# Altium PCB PCB1.PcbDoc
Units mm, origin at the board's own origin, x right, y up, seen from the top; angles counter-clockwise.
Board outline 40 x 38 mm, 4 copper layers (Top Layer, Layer 1, Layer 2, Bottom Layer), stack 1.564 mm thick; 16 components, 17 nets, 195 pads, 94 vias.
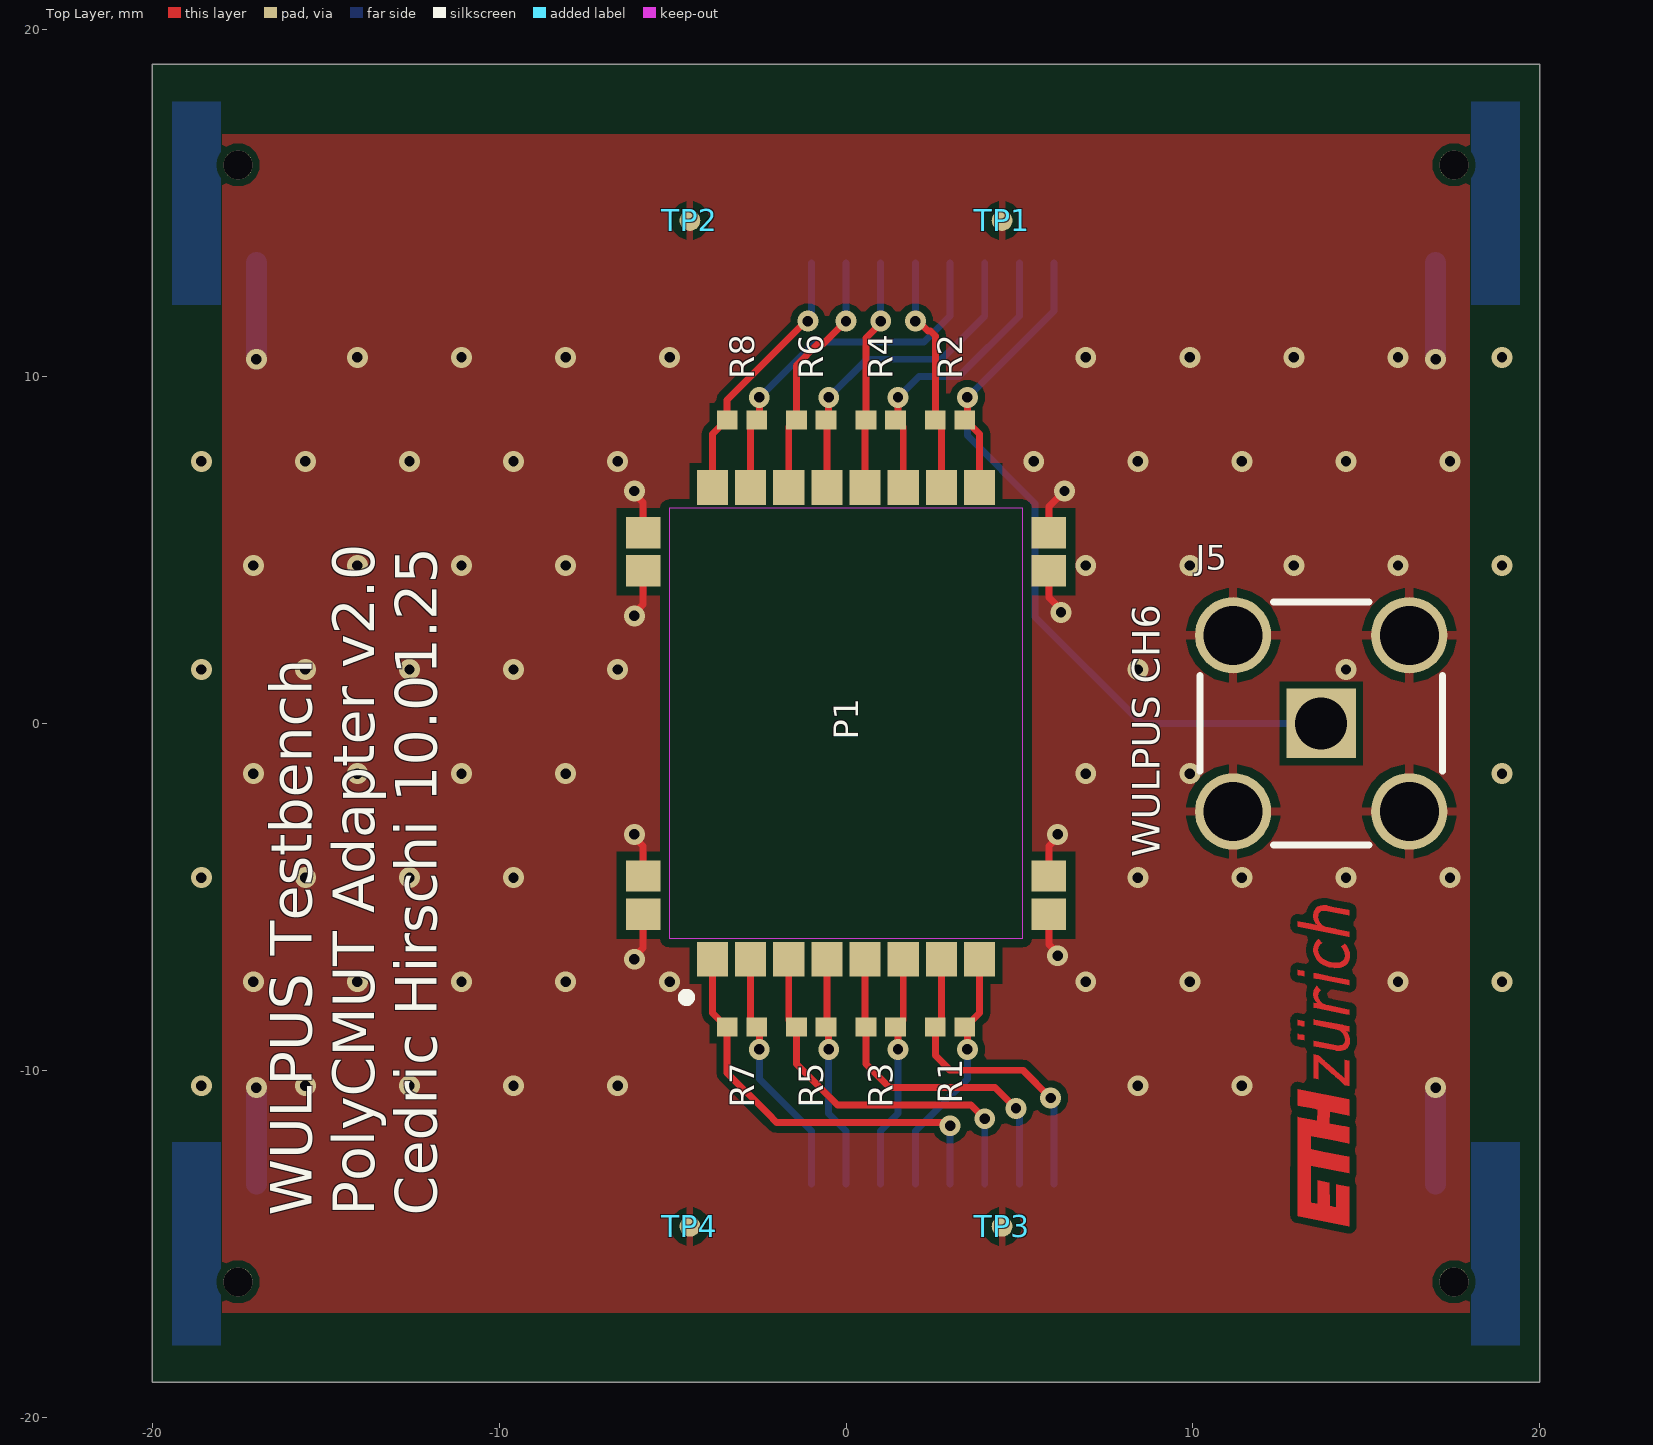
[diagram p0: Top Layer view]
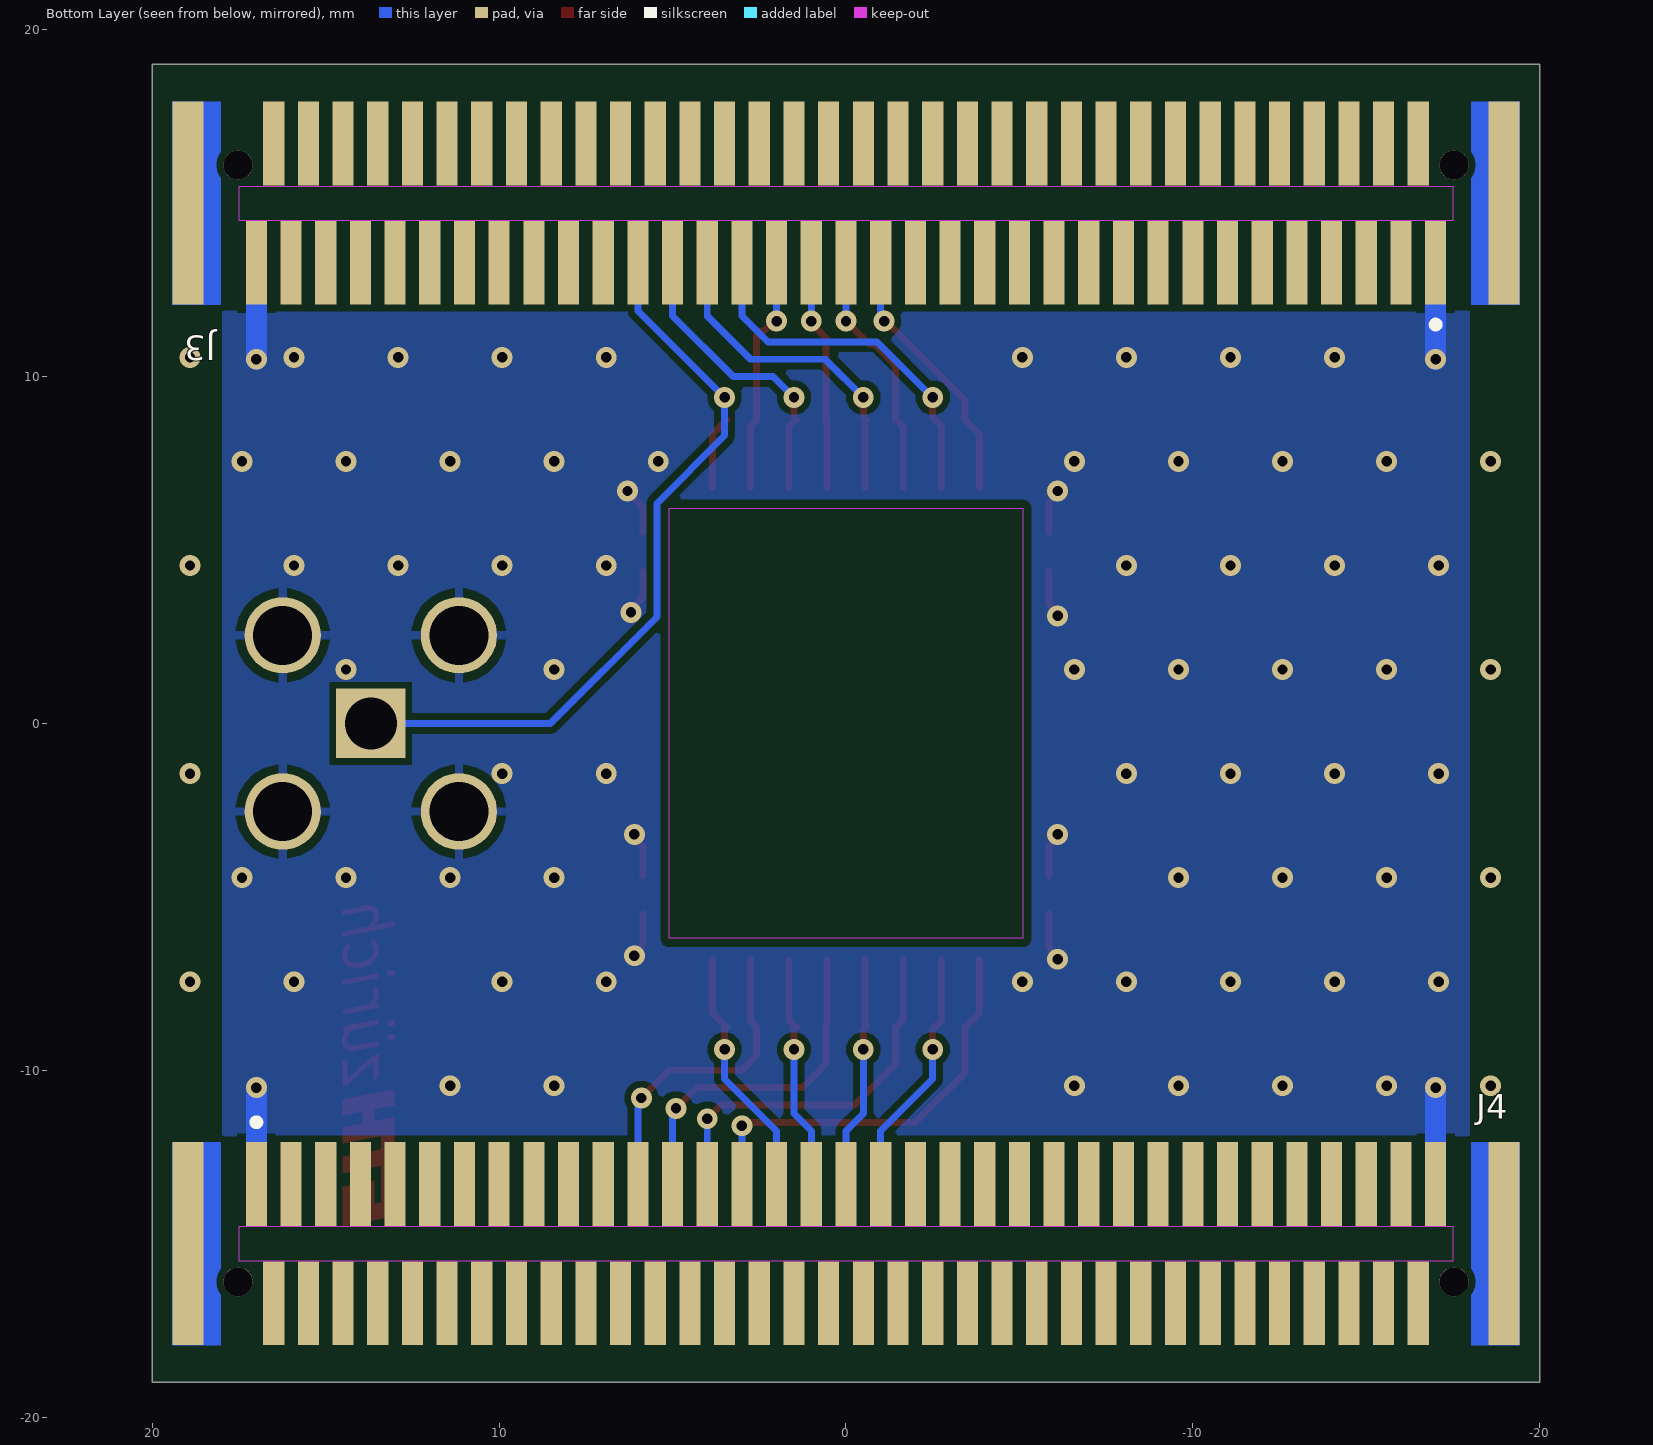
[diagram p1: Bottom Layer view, seen from below]
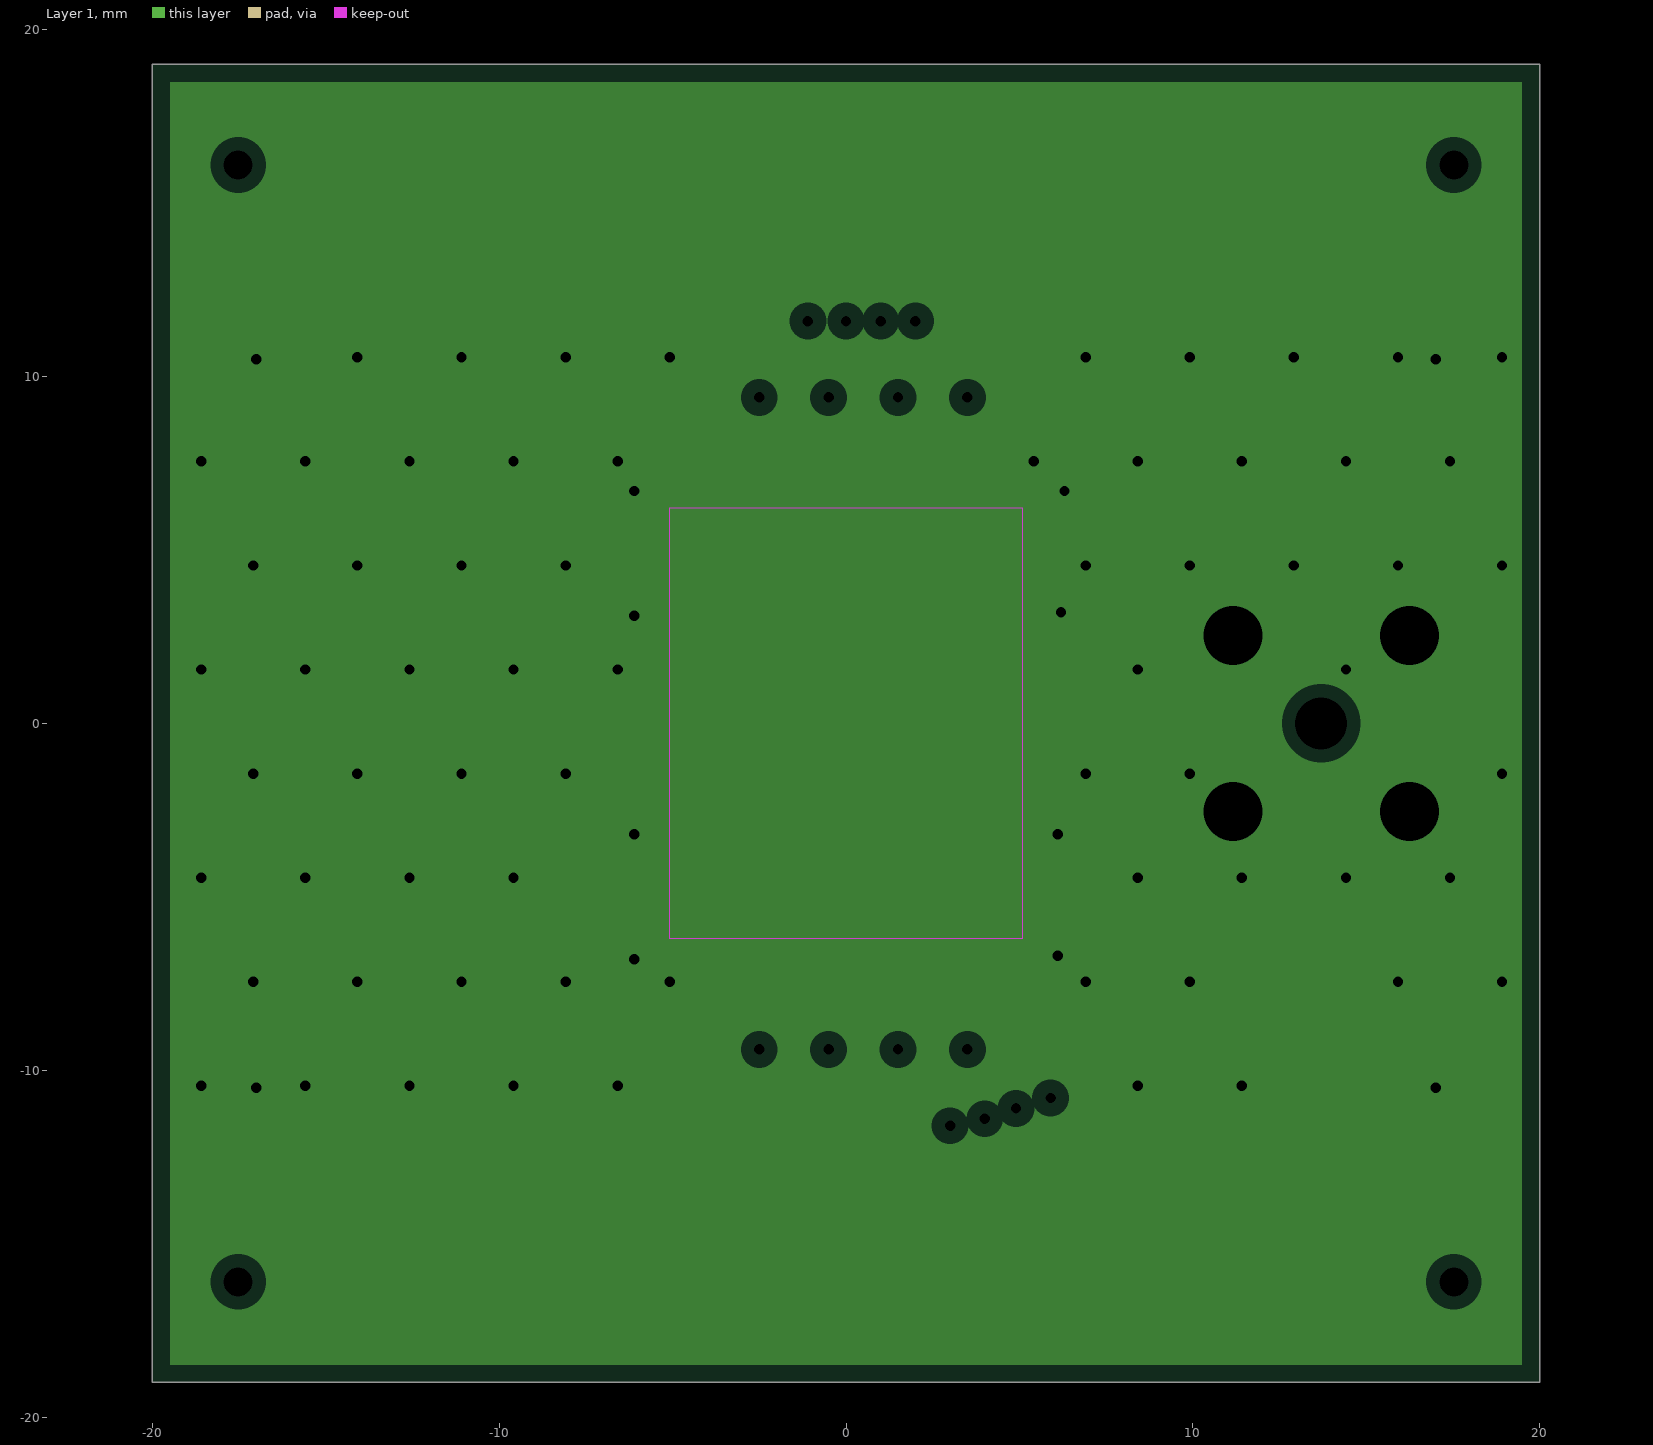
[diagram p2: Layer 1, clearances drawn from the general rule]
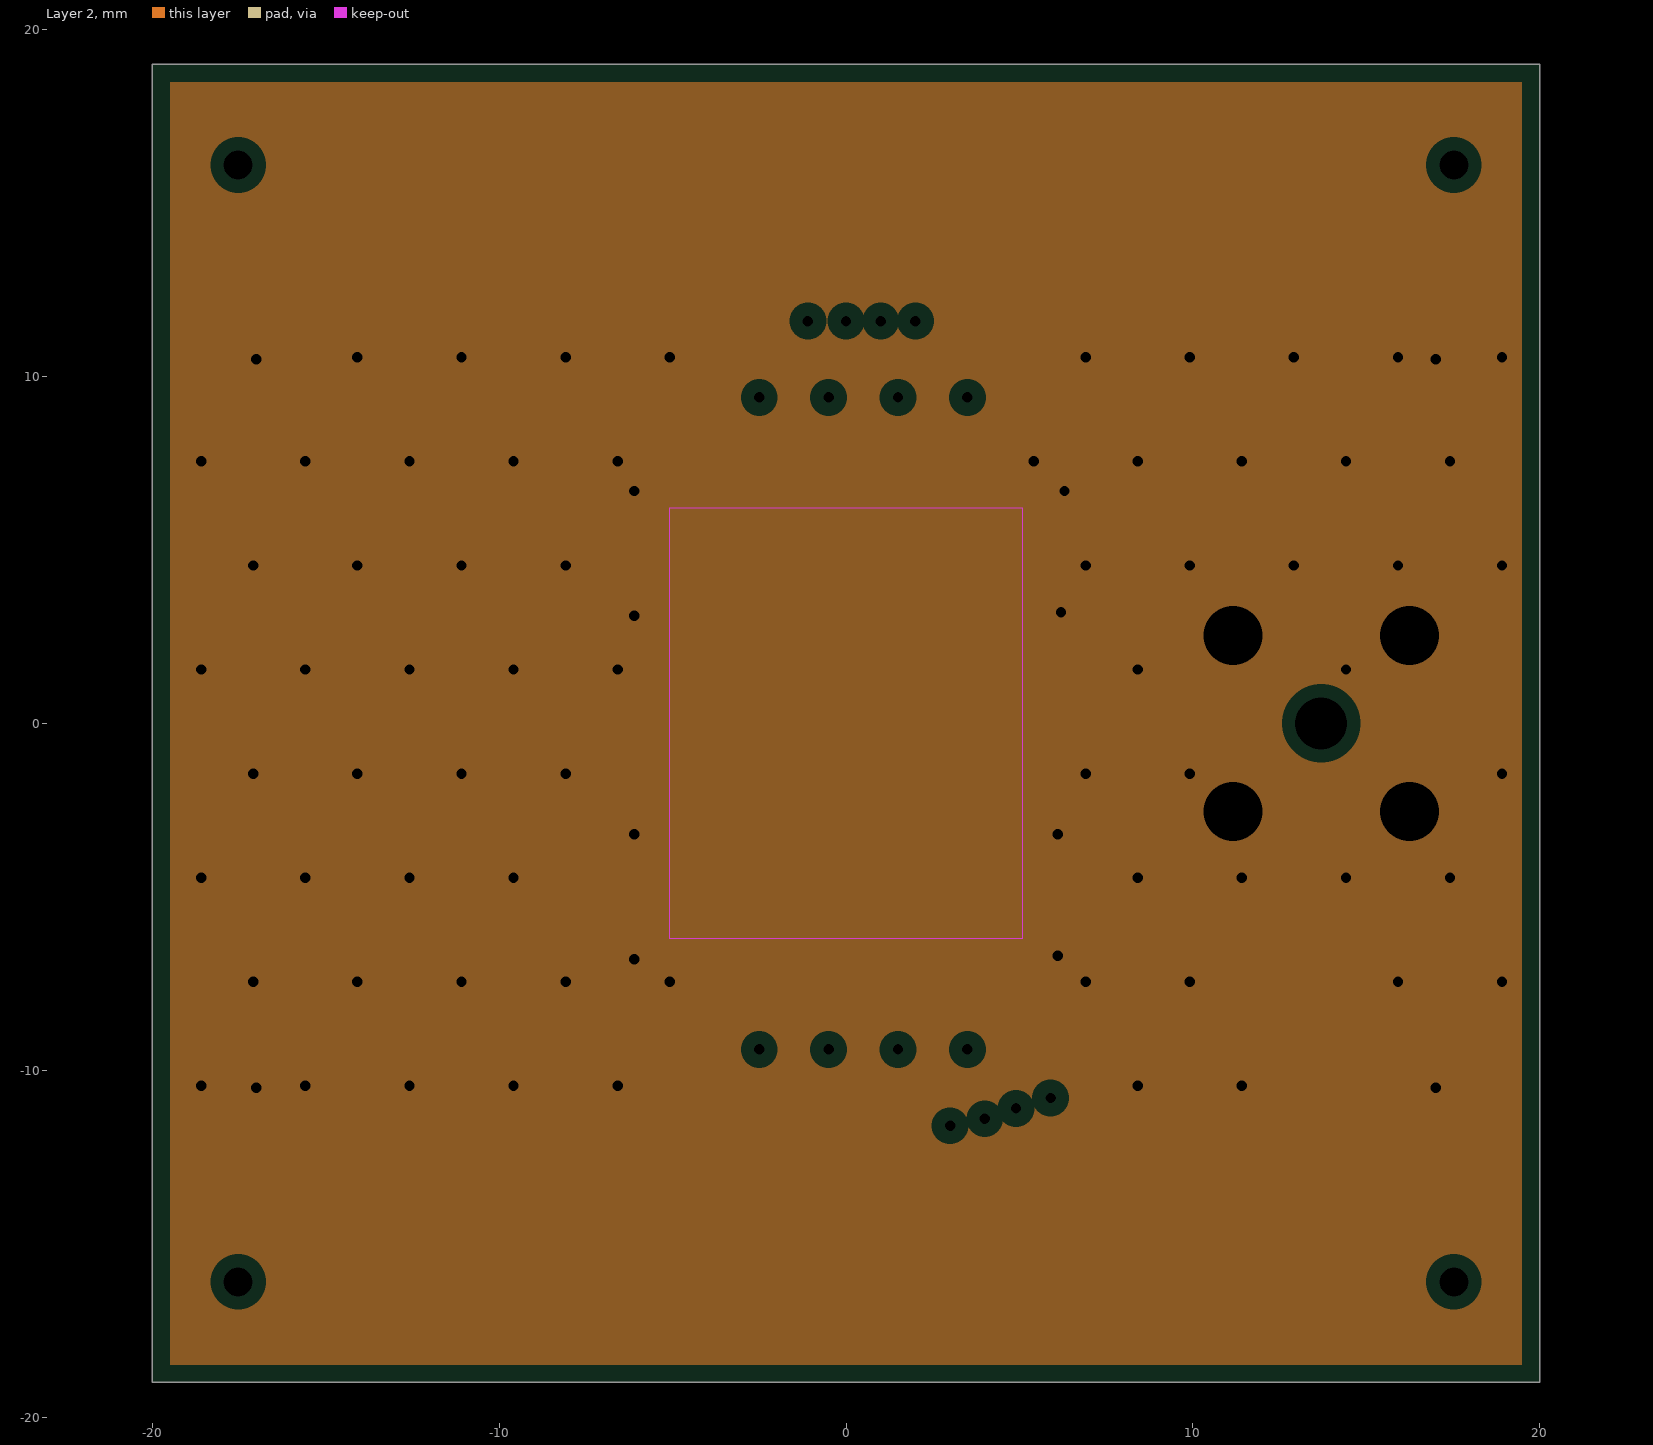
[diagram p3: Layer 2, clearances drawn from the general rule]

## Layer stack, top to bottom
Top Solder: solder mask 0.0127, Solder Resist, Dk 3.3
Top Layer: signal copper 0.035
Dielectric 1: prepreg 0.0994, PP-015, Dk 4.3
Layer 1: plane copper 0.0152, net GND
Dielectric1: core 1.265, FR-4, Dk 4.3
Layer 2: plane copper 0.0152, net GND
Dielectric 2: prepreg 0.0994, PP-015, Dk 4.3
Bottom Layer: signal copper 0.035
Bottom Solder: solder mask 0.0127, Solder Resist, Dk 3.3

## Board outline
-20,-19 -20,19 20,19 20,-19

## Design rules (kind name [scope] priority, off if disabled: settings)
BoardOutlineClearance BoardOutlineClearance_1 [All] p1: gap=0.3 ignorepadtopadclearanceinfootprint=FALSE except(2: Poly-OutlineEdge)
Clearance Clearance_1 [OnMid vs OnMid] p1: gap=0.2 ignorepadtopadclearanceinfootprint=FALSE sourcerule=43 cellrowname=All cellrowtype=0 cellcolname=All cellcoltype=0 innerlayers=TRUE
Clearance Clearance_2 [(ExistsOnLayer('Top Layer') Or ExistsOnLayer('Bottom Layer')) vs (ExistsOnLayer('Top Layer') Or ExistsOnLayer('Bottom Layer'))] p2: gap=0.2 ignorepadtopadclearanceinfootprint=FALSE sourcerule=43 cellrowname=All cellrowtype=0 cellcolname=All cellcoltype=0 outerlayers=TRUE
Clearance [All] p3: gap=0.254 ignorepadtopadclearanceinfootprint=FALSE ismatrix=TRUE
HoleSize [All] p1: absolutevalues=TRUE maxlimit=7.62 minlimit=0.15 maxpercent=80.000 minpercent=20.000
MinimumAnnularRing [All] p1: minimumring=0.13
MinimumSolderMaskSliver [All] p1: minsoldermaskwidth=0.1
PasteMaskExpansion [All] p1: expansion=0.254
PlaneClearance [All] p1: clearance=0.381
PlaneConnect [All] p1: planeconnectstyle=Direct reliefexpansion=0.508 reliefentries=2 reliefconductorwidth=0.254 reliefairgap=0.254
PolygonConnect [All] p1: thpad.connectstyle=Relief thpad.reliefconductorwidth=0.254 thpad.reliefentries=4 thpad.polygonreliefangle="90 Angle" thpad.airgapwidth=0.254 smdpad.connectstyle=Relief smdpad.reliefconductorwidth=0.2 smdpad.reliefentries=2 smdpad.polygonreliefangle="90 Angle" smdpad.airgapwidth=0.254 via.connectstyle=Direct via.reliefconductorwidth=0.254 via.reliefentries=4 via.polygonreliefangle="90 Angle" via.airgapwidth=0.254
RoomDefinition Sheet1 [InComponentClass('Sheet1')] p1: confinementstyle=ConfineIn formatcopy=TRUE lockcomponents=FALSE outline -26.4,-25.4 25.2,-25.4 25.2,25.5 -26.4,25.5
RoutingVias RoutingViaStyle_1 [All] p1: holewidth=0.2 width=0.4 viastyle="Through Hole" minholewidth=0.2 minwidth=0.4 maxholewidth=0.6 maxwidth=0.8
RoutingVias [All] p2: holewidth=0.3 width=0.6 viastyle="Through Hole" minholewidth=0.3 minwidth=0.6 maxholewidth=0.3 maxwidth=0.6
SMDNeckDown [All] p1: percent=100.000
SilkToSolderMaskClearance SilkscreenOverComponentPads [IsPad] p1: minsilkscreentomaskgap=0.254 clearancetoexposedcopper=TRUE
SolderMaskExpansion SolderMaskExpansion_via [IsVia] p1: expansion=0.102 istentingtop=TRUE useseparateexpansions=TRUE expansionbottom=0.102 istentingbottom=TRUE
SolderMaskExpansion [All] p2: expansion=0.1 istentingtop=FALSE
Width MaxMinWidth_1 [All] p1: maxlimit=1 minlimit=0.2 preferedwidth=0.2 minimp=50.000000 maximp=50.000000 favimp=50.000000
Width [All] p2: maxlimit=0.254 minlimit=0.2 preferedwidth=0.2 minimp=50.000000 maximp=50.000000 favimp=50.000000
24 further rules are at their usual default settings.

## Components (designator, comment, footprint, x,y, rotation, side; value= is the part's Value field where it differs from the comment)
J3 "91910-21169LF" AMPHENOL_91910-21169LF 0,-15 r180 bottom locked
J4 "91910-21169LF" AMPHENOL_91910-21169LF 0,15 r0 bottom locked
J5 "901-144-8RFX" AMPH-901-144-8RFX_V 13.7,0 r0 top locked
P1 "polycmut" Interposer 0,0 r180 top
R1 "0" RESC1005X40X25NL05T10 3,-8.75 r180 top
R2 "0" RESC1005X40X25NL05T10 3,8.75 r180 top
R3 "0" RESC1005X40X25NL05T10 1,-8.75 r180 top
R4 "0" RESC1005X40X25NL05T10 1,8.75 r180 top
R5 "0" RESC1005X40X25NL05T10 -1,-8.75 r180 top
R6 "0" RESC1005X40X25NL05T10 -1,8.75 r180 top
R7 "0" RESC1005X40X25NL05T10 -3,-8.75 r180 top
R8 "0" RESC1005X40X25NL05T10 -3,8.75 r180 top
TP1 "TPAD6R" TP06R 4.5,14.5 r90 top locked
TP2 "TPAD6R" TP06R -4.5,14.5 r90 top locked
TP3 "TPAD6R" TP06R 4.5,-14.5 r90 top locked
TP4 "TPAD6R" TP06R -4.5,-14.5 r90 top locked

## Footprints (in the part's own frame and the unit in brackets; to place one, negate y for a bottom-side part, rotate by r counter-clockwise, add the part's x,y. Pads: shape width x height; smd on the part's side, far side on the other; paste and mask are expansions set on the pad)
AMPH-901-144-8RFX_V [mm] "THD, 5-Leads, Body 7x7mm, Pitch 2.54mm"
  rect 2x2 hole 1.5: 1(0,0)
  round 2.2 hole 1.7: 2(-2.54,2.54) 3(-2.54,-2.54) 4(2.54,-2.54) 5(2.54,2.54)
  silkscreen extent -3.5,-3.5 3.5,3.5, body extent -3.55,-3.55 3.55,3.55, height 9.53
AMPHENOL_91910-21169LF [mm]
  rect 0.61x2.41 smd paste-2: 1(-17,1.72) 2(-16,1.72) 3(-15,1.72) 4(-14,1.72) 5(-13,1.72) 6(-12,1.72) 7(-11,1.72) 8(-10,1.72) 9(-9,1.72) 10(-8,1.72) 11(-7,1.72) 12(-6,1.72) 13(-5,1.72) 14(-4,1.72) 15(-3,1.72) 16(-2,1.72) 17(-1,1.72) 18(0,1.72) 19(1,1.72) 20(2,1.72) 21(3,1.72) 22(4,1.72) 23(5,1.72) 24(6,1.72) 25(7,1.72) 26(8,1.72) 27(9,1.72) 28(10,1.72) 29(11,1.72) 30(12,1.72) 31(13,1.72) 32(14,1.72) 33(15,1.72) 34(16,1.72) 35(17,1.72) 36(-16.5,-1.72) 37(-15.5,-1.72) 38(-14.5,-1.72) 39(-13.5,-1.72) 40(-12.5,-1.72) 41(-11.5,-1.72) 42(-10.5,-1.72) 43(-9.5,-1.72) 44(-8.5,-1.72) 45(-7.5,-1.72) 46(-6.5,-1.72) 47(-5.5,-1.72) 48(-4.5,-1.72) 49(-3.5,-1.72) 50(-2.5,-1.72) 51(-1.5,-1.72) 52(-0.5,-1.72) 53(0.5,-1.72) 54(1.5,-1.72) 55(2.5,-1.72) 56(3.5,-1.72) 57(4.5,-1.72) 58(5.5,-1.72) 59(6.5,-1.72) 60(7.5,-1.72) 61(8.5,-1.72) 62(9.5,-1.72) 63(10.5,-1.72) 64(11.5,-1.72) 65(12.5,-1.72) 66(13.5,-1.72) 67(14.5,-1.72) 68(15.5,-1.72) 69(16.5,-1.72)
  rect 0.89x5.85 smd mask+0: SH1(-18.975,0) SH2(18.975,0)
  round 0.84 hole 0.84 unplated: ""(-17.526,-1.1) ""(17.526,-1.1)
  Top Layer region: -18.02,-0.71 -18.029,-0.722 -18.038,-0.733 -18.046,-0.744 -18.054,-0.756 -18.062,-0.768 -18.069,-0.78 -18.076,-0.792 -18.083,-0.804 -18.089,-0.817 -18.096,-0.829 -18.101,-0.842 -18.107,-0.855 -18.112,-0.868 -18.117,-0.881 -18.122,-0.894 -18.127,-0.907 -18.131,-0.921 -18.135,-0.934 -18.138,-0.948 -18.141,-0.962 -18.144,-0.975 -18.147,-0.989 -18.149,-1.003 -18.151,-1.017 -18.152,-1.031 -18.153,-1.045 -18.154,-1.059 -18.155,-1.073 -18.155,-1.087 -18.155,-1.1 -18.155,-1.113 -18.155,-1.127 -18.154,-1.141 -18.153,-1.155 -18.152,-1.169 -18.151,-1.183 -18.149,-1.197 -18.147,-1.211 -18.144,-1.225 -18.141,-1.238 -18.138,-1.252 -18.135,-1.266 -18.131,-1.279 -18.127,-1.293 -18.122,-1.306 -18.117,-1.319 -18.112,-1.332 -18.107,-1.345 -18.101,-1.358 -18.096,-1.371 -18.089,-1.383 -18.083,-1.396 -18.076,-1.408 -18.069,-1.42 -18.062,-1.432 -18.054,-1.444 -18.046,-1.456 -18.038,-1.467 -18.029,-1.478 -18.02,-1.49 -18.02,-2.925 -19.42,-2.925 -19.42,2.925 -18.02,2.925
  Top Layer region: 19.42,-2.925 18.02,-2.925 18.02,-1.49 18.029,-1.478 18.038,-1.467 18.046,-1.456 18.054,-1.444 18.062,-1.432 18.069,-1.42 18.076,-1.408 18.083,-1.396 18.089,-1.383 18.096,-1.371 18.101,-1.358 18.107,-1.345 18.112,-1.332 18.117,-1.319 18.122,-1.306 18.127,-1.293 18.131,-1.279 18.135,-1.266 18.138,-1.252 18.141,-1.238 18.144,-1.225 18.147,-1.211 18.149,-1.197 18.151,-1.183 18.152,-1.169 18.153,-1.155 18.154,-1.141 18.155,-1.127 18.155,-1.113 18.155,-1.11 18.155,-1.1 18.155,-1.087 18.155,-1.073 18.154,-1.059 18.153,-1.045 18.152,-1.031 18.151,-1.017 18.149,-1.003 18.147,-0.989 18.144,-0.975 18.141,-0.962 18.138,-0.948 18.135,-0.934 18.131,-0.921 18.127,-0.907 18.122,-0.894 18.117,-0.881 18.112,-0.868 18.107,-0.855 18.101,-0.842 18.096,-0.829 18.089,-0.817 18.083,-0.804 18.076,-0.792 18.069,-0.78 18.062,-0.768 18.054,-0.756 18.046,-0.744 18.038,-0.733 18.029,-0.722 18.02,-0.71 18.02,2.925 19.42,2.925
  silkscreen extent -17.1,3.4 -16.9,3.6, body extent -19.65,-2.8 19.65,2.8, height 3.61
Interposer [mm]
  rect 1x0.9 smd: 1(5.85,4.4) 1(5.85,5.5) 10(-5.85,4.4) 10(-5.85,5.5) 11(5.85,-5.5) 11(5.85,-4.4) 20(-5.85,-5.5) 20(-5.85,-4.4)
  rect 0.9x1 smd: 2(3.85,6.8) 3(2.75,6.8) 4(1.65,6.8) 5(0.55,6.8) 6(-0.55,6.8) 7(-1.65,6.8) 8(-2.75,6.8) 9(-3.85,6.8) 12(3.85,-6.8) 13(2.75,-6.8) 14(1.65,-6.8) 15(0.55,-6.8) 16(-0.55,-6.8) 17(-1.65,-6.8) 18(-2.75,-6.8) 19(-3.85,-6.8)
  silkscreen extent 4.47,7.78 4.72,8.02, body extent -5.75,-6.7 5.75,6.7, height 1.6
RESC1005X40X25NL05T10 [mm] "Chip Resistor, 2-Leads, Body 1.00x0.50mm, IPC Medium Density"
  rect 0.6x0.55 smd: 1(-0.425,0) 2(0.425,0)
  body extent -0.53,-0.27 0.53,0.28, height 0.4
TP06R [mm] "Testpoint, round, d=0.6mm"
  round 0.6 smd paste-1: 1(0,0)

## Part data
J3 J4: Package=None, Availability=Unavailable, MF="Amphenol ICC (FCI)", MP=91910-21169LF, Price=None
J5: library part CMP-2000-05706-1, "Coaxial Connector, 18 GHz, 50 Ohm, -65 to 165 degC, 5-Pin THD, RoHS, Bulk", Dielectric Material=Polytetrafluoroethylene(PTFE), Frequency - Max=18GHz, Housing Color=Gold, Manufacturer=Amphenol, Operating Temperature=-65°C~165°C, Package Description="5-Pin Through Hole Device, Body 7 x 7 mm, Pitch 2.54 mm", Standard Package=1, Voltage Rating=-, 3D Model=901-144-8RFX.igs, Body Finish=Gold, Body Material=Brass, Cable Group=-, Category=Connectors,Interconnects, Center Contact Material=BerylliumCopper, Center Contact Plating=Gold, Connector Style=SMA, Connector Type=Jack,FemaleSocket, Contact Termination=Solder, Datasheet URL=https://datasheet.ciiva.com/23676/c901-144-8rfx-23676337.pdf, Datasheet Version="Rev. A, 01/2001", Family=CoaxialConnectors(RF), Fastening Type=Threaded, Features=-, Impedance=50Ohm, Ingress Protection=-, Manufacturer URL=http://www.amphenol.com/, Mounting Technology=SurfaceMount, Mounting Type=ThroughHole, Online Catalog=SMA,RFX, Other Names=901-144-8-RFX9011448RFXARFX1231, Package Reference=901-144-8RFX, Packaging=Bulk, Series=-, Shield Termination=Solder
R1 R2 R3 R4 R5 R6 R7 R8: library part CMP-1011-00001-2, Manufacturer="Yageo / Phycomp", Part Number=RC0402JR-070RL
TP1 TP2 TP3 TP4: library part CMP-00028-00002-2, "0.6mm round", Pins=1

## Via types
v1: diameter 0.6, hole 0.3, Top Layer to Bottom Layer, tented both sides, 66 vias
v2: diameter 0.6/0.6 (per signal layer), hole 0.3, Top Layer to Bottom Layer, tented both sides, 28 vias

## Nets (pads, with @x,y where several pads share a name; then routed paths per layer and width w, separated by ;. In a path a pad name is that pad's centre, name@x,y a point inside that pad or via, vN(x,y) a via of type N, cw(c..) or ccw(c..) an arc to the next point about the centre after c; other vN are vias at no path point)
CH1: J3.15 P1.2 R7.2 | length 12.2
  Top Layer w0.2: P1.2 -3.85,-8.35 -3.45,-8.75 R7.2 -3.425,-10.075 -2.25,-11.25 -2,-11.5 2.733,-11.5 2.775,-11.543 2.943,-11.543 v2(3,-11.6)
  Bottom Layer w0.2: J3.15 v2(3,-11.6)
CH2: J3.19 P1.3 R7.1 | length 7.2
  Top Layer w0.2: P1.3 -2.75,-8.575 -2.5,-8.825 v2(-2.5,-9.4)
  Bottom Layer w0.2: v2(-2.5,-9.4) -2.5,-10.25 -1,-11.75 J3.19
CH3: J3.14 P1.4 R5.2 | length 11.1
  Top Layer w0.2: P1.4 -1.65,-8.55 -1.45,-8.75 R5.2 -1.425,-9.825 -0.25,-11 3.6,-11 v2(4,-11.4)
  Bottom Layer w0.2: J3.14 v2(4,-11.4)
CH4: J3.18 P1.5 R5.1 | length 6.7
  Top Layer w0.2: P1.5 -0.55,-8.725 R5.1 -0.5,-8.825 v2(-0.5,-9.4)
  Bottom Layer w0.2: v2(-0.5,-9.4) -0.5,-11.25 0,-11.75 J3.18
CH5: J3.13 P1.6 R3.2 | length 10.1
  Top Layer w0.2: P1.6 0.55,-8.725 R3.2 0.575,-9.825 1.25,-10.5 4.3,-10.5 v2(4.9,-11.1)
  Bottom Layer w0.2: v2(4.9,-11.1) 4.9,-11.181 5,-11.281 J3.13
CH6: J3.17 P1.7 R3.1 | length 6.8
  Top Layer w0.2: v2(1.5,-9.4) 1.5,-8.825 R3.1 1.45,-8.75 1.65,-8.55 P1.7
  Bottom Layer w0.2: J3.17 1,-11.75 1.5,-11.25 v2(1.5,-9.4)
CH7: J3.12 P1.8 R1.2 | length 9.2
  Top Layer w0.2: P1.8 2.75,-8.575 R1.2 2.575,-9.575 3,-10 5.1,-10 v2(5.9,-10.8)
  Bottom Layer w0.2: v2(5.9,-10.8) 5.9,-10.881 6,-10.981 J3.12
CH8: J3.16 P1.9 R1.1 | length 7.3
  Top Layer w0.2: v2(3.5,-9.4) 3.5,-8.825 R1.1 3.45,-8.75 3.85,-8.35 P1.9
  Bottom Layer w0.2: J3.16 2,-11.75 3.5,-10.25 v2(3.5,-9.4)
CH9: J4.24 J5.1 P1.19 R2.1 | length 24.4
  Top Layer w0.2: v2(3.5,9.4) 3.5,8.825 R2.1 3.45,8.75 3.85,8.35 P1.19
  Bottom Layer w0.2: J4.24 5.992,13.272 5.992,11.892 v2(3.5,9.4) 3.5,8.301 5.454,6.347 5.454,3.072 8.526,0 J5.1
CH10: J4.20 P1.18 R2.2 | length 6.9
  Top Layer w0.2: v2(2,11.6) 2.081,11.6 2.365,11.316 2.434,11.316 2.575,11.175 R2.2 2.75,8.575 P1.18
  Bottom Layer w0.2: v2(2,11.6) J4.20
CH11: J4.23 P1.17 R4.1 | length 8.7
  Top Layer w0.2: v2(1.5,9.4) 1.5,8.825 R4.1 1.45,8.75 1.65,8.55 P1.17
  Bottom Layer w0.2: v2(1.5,9.4) 2.1,10 3.25,10 5,11.75 J4.23
CH12: J4.19 P1.16 R4.2 | length 6.7
  Top Layer w0.2: P1.16 0.55,8.725 R4.2 0.575,11.106 1,11.531 v2(1,11.6)
  Bottom Layer w0.2: v2(1,11.6) J4.19
CH13: J4.22 P1.15 R6.1 | length 9.6
  Top Layer w0.2: P1.15 -0.55,8.725 R6.1 -0.5,8.825 v2(-0.5,9.4)
  Bottom Layer w0.2: v2(-0.5,9.4) 0.6,10.5 2.75,10.5 4,11.75 J4.22
CH14: J4.18 P1.14 R6.2 | length 7.3
  Top Layer w0.2: P1.14 -1.65,8.55 -1.45,8.75 R6.2 -1.425,10.325 -0.816,10.934 -0.666,10.934 v2(0,11.6)
  Bottom Layer w0.2: v2(0,11.6) J4.18
CH15: J4.21 P1.13 R8.1 | length 10.7
  Top Layer w0.2: P1.13 -2.75,8.575 -2.5,8.825 v2(-2.5,9.4)
  Bottom Layer w0.2: v2(-2.5,9.4) -0.9,11 2.25,11 3,11.75 J4.21
CH16: J4.17 P1.12 R8.2 | length 7.7
  Top Layer w0.2: P1.12 -3.85,8.35 -3.45,8.75 R8.2 -3.425,9.325 -1.15,11.6 v2(-1.1,11.6)
  Bottom Layer w0.2: v2(-1.1,11.6) -1.1,11.681 -1,11.781 J4.17
GND: J3.1 J3.35 J4.1 J4.35 J5.2 J5.3 J5.4 J5.5 P1.1 P1.10 P1.11 P1.20 TP1.1 TP2.1 TP3.1 TP4.1 | length 21.9
  Top Layer w0.2: v2(-6.1,-6.8) -6.1,-6.719 -5.85,-6.469 P1.1@-5.85,-5.5 ; v2(-6.1,-3.2) -6.1,-3.281 -5.85,-3.531 P1.1@-5.85,-4.4 ; v2(-6.1,3.1) -6.1,3.181 -5.85,3.431 P1.11@-5.85,4.4 ; v2(-6.1,6.7) -6.1,6.619 -5.85,6.369 P1.11@-5.85,5.5 ; P1.10@5.85,-5.5 5.85,-6.369 6.1,-6.619 v2(6.1,-6.7) ; P1.10@5.85,-4.4 5.85,-3.531 6.1,-3.281 v2(6.1,-3.2) ; P1.20@5.85,4.4 5.85,3.628 6.2,3.278 v2(6.2,3.2) ; P1.20@5.85,5.5 5.85,6.25 v2(6.3,6.7)
  Bottom Layer w0.61: J3.35 v2(-17,-10.5) ; v2(-17,10.5) J4.1 ; J3.1 v2(17,-10.5) ; v2(17,10.5) J4.35
  other v1: -18.586,-10.446 -15.586,-10.446 -12.586,-10.446 -9.586,-10.446 -6.586,-10.446 8.414,-10.446 11.414,-10.446 -17.086,-7.446 -14.086,-7.446 -11.086,-7.446 -8.086,-7.446 -5.086,-7.446 6.914,-7.446 9.914,-7.446 15.914,-7.446 18.914,-7.446 -18.586,-4.446 -15.586,-4.446 -12.586,-4.446 -9.586,-4.446 8.414,-4.446 11.414,-4.446 14.414,-4.446 17.414,-4.446 -17.086,-1.446 -14.086,-1.446 -11.086,-1.446 -8.086,-1.446 6.914,-1.446 9.914,-1.446 18.914,-1.446 -18.586,1.554 -15.586,1.554 -12.586,1.554 -9.586,1.554 -6.586,1.554 8.414,1.554 14.414,1.554 -17.086,4.554 -14.086,4.554 -11.086,4.554 -8.086,4.554 6.914,4.554 9.914,4.554 12.914,4.554 15.914,4.554 18.914,4.554 -18.586,7.554 -15.586,7.554 -12.586,7.554 -9.586,7.554 -6.586,7.554 5.414,7.554 8.414,7.554 11.414,7.554 14.414,7.554 17.414,7.554 -14.086,10.554 -11.086,10.554 -8.086,10.554 -5.086,10.554 6.914,10.554 9.914,10.554 12.914,10.554 15.914,10.554 18.914,10.554
pads on no net: J3. J3.2 J3.3 J3.4 J3.5 J3.6 J3.7 J3.8 J3.9 J3.10 J3.11 J3.20 J3.21 J3.22 J3.23 J3.24 J3.25 J3.26 J3.27 J3.28 J3.29 J3.30 J3.31 J3.32 J3.33 J3.34 J3.36 J3.37 J3.38 J3.39 J3.40 J3.41 J3.42 J3.43 J3.44 J3.45 J3.46 J3.47 J3.48 J3.49 J3.50 J3.51 J3.52 J3.53 J3.54 J3.55 J3.56 J3.57 J3.58 J3.59 J3.60 J3.61 J3.62 J3.63 J3.64 J3.65 J3.66 J3.67 J3.68 J3.69 J3.SH1 J3.SH2 J4. J4.2 J4.3 J4.4 J4.5 J4.6 J4.7 J4.8 J4.9 J4.10 J4.11 J4.12 J4.13 J4.14 J4.15 J4.16 J4.25 J4.26 J4.27 J4.28 J4.29 J4.30 J4.31 J4.32 J4.33 J4.34 J4.36 J4.37 J4.38 J4.39 J4.40 J4.41 J4.42 J4.43 J4.44 J4.45 J4.46 J4.47 J4.48 J4.49 J4.50 J4.51 J4.52 J4.53 J4.54 J4.55 J4.56 J4.57 J4.58 J4.59 J4.60 J4.61 J4.62 J4.63 J4.64 J4.65 J4.66 J4.67 J4.68 J4.69 J4.SH1 J4.SH2

## Polygon pours and split planes (outlines as drawn)
GND on Bottom Layer "GND_L04_P000" (solid, remove dead copper, pour order 0): -22.5,22.5 -22.5,-22.5 22.5,-22.5 22.5,22.5
GND on Top Layer "GND_L01_P001" (solid, remove dead copper, pour order 1): -22.5,22.5 -22.5,-22.5 22.5,-22.5 22.5,22.5
GND on Layer 2 (split plane): 19.49,-18.49 -19.49,-18.49 -19.49,18.49 19.49,18.49
GND on Layer 1 (split plane): 19.49,-18.49 -19.49,-18.49 -19.49,18.49 19.49,18.49

## Keep-outs
Bottom Layer:
  rectangle: -17.5,14.49 17.5,15.49
  rectangle: -17.5,-15.5 17.5,-14.5
Keep-Out Layer:
  rectangle: -5.1,-6.2 5.1,6.2

## Other copper
Top Layer:
  region: 13.636,-6.221 13.643,-6.234 13.67,-6.262 13.677,-6.275 13.704,-6.303 13.711,-6.317 13.725,-6.33 13.708,-6.348 13.694,-6.354 13.643,-6.406 13.622,-6.454 13.615,-6.481 13.608,-6.543 13.615,-6.564 13.622,-6.619 13.67,-6.708 13.701,-6.746 13.728,-6.773 13.742,-6.78 13.756,-6.794 13.77,-6.8 13.886,-6.855 13.934,-6.869 13.989,-6.883 14.085,-6.897 14.175,-6.903 14.195,-6.897 14.243,-6.89 14.319,-6.849 14.356,-6.811 14.377,-6.763 14.391,-6.708 14.384,-6.605 14.329,-6.502 14.315,-6.488 14.308,-6.475 14.274,-6.44 14.277,-6.43 14.291,-6.423 14.319,-6.396 14.332,-6.389 14.36,-6.361 14.374,-6.354 14.38,-6.348 14.411,-6.378 14.418,-6.392 14.432,-6.406 14.439,-6.42 14.452,-6.433 14.5,-6.536 14.521,-6.619 14.528,-6.687 14.521,-6.776 14.514,-6.797 14.504,-6.835 14.48,-6.886 14.446,-6.934 14.432,-6.948 14.428,-6.958 14.415,-6.965 14.394,-6.986 14.38,-6.993 14.332,-7.02 14.298,-7.034 14.253,-7.044 14.212,-7.051 14.085,-7.054 14.065,-7.048 13.986,-7.037 13.958,-7.03 13.924,-7.024 13.886,-7.013 13.842,-6.996 13.773,-6.969 13.674,-6.91 13.66,-6.897 13.646,-6.89 13.574,-6.818 13.567,-6.804 13.553,-6.79 13.499,-6.674 13.485,-6.619 13.478,-6.571 13.475,-6.505 13.481,-6.437 13.495,-6.382 13.526,-6.324 13.574,-6.262 13.591,-6.245 13.605,-6.238 13.619,-6.224 13.632,-6.217
  region: 14.377,-9.762 14.38,-9.703 14.497,-9.724 14.511,-9.731 14.514,-10.448 14.483,-10.451 14.463,-10.445 14.384,-10.427 14.353,-10.397 14.339,-10.39 14.291,-10.342 14.277,-10.335 14.229,-10.287 14.216,-10.28 14.175,-10.239 14.161,-10.232 14.113,-10.184 14.099,-10.177 14.058,-10.136 14.044,-10.129 13.996,-10.081 13.982,-10.074 13.934,-10.026 13.921,-10.019 13.879,-9.978 13.866,-9.971 13.818,-9.923 13.804,-9.916 13.756,-9.868 13.742,-9.861 13.701,-9.82 13.687,-9.813 13.639,-9.765 13.622,-9.762 13.619,-10.259 13.56,-10.249 13.492,-10.235 13.485,-10.215 13.488,-9.539 13.547,-9.549 13.615,-9.563 13.653,-9.6 13.667,-9.607 13.715,-9.655 13.728,-9.662 13.776,-9.71 13.79,-9.717 13.838,-9.765 13.852,-9.772 13.9,-9.82 13.914,-9.827 13.955,-9.868 13.969,-9.875 14.017,-9.923 14.03,-9.93 14.078,-9.978 14.092,-9.985 14.14,-10.033 14.154,-10.04 14.202,-10.088 14.216,-10.095 14.264,-10.143 14.277,-10.15 14.319,-10.191 14.332,-10.198 14.374,-10.239 14.377,-9.769
  region: 14.514,-12.617 14.511,-12.97 13.399,-12.75 13.396,-13.804 13.433,-13.814 13.595,-13.845 13.598,-13.176 13.934,-13.245 13.941,-13.917 14,-13.927 14.102,-13.948 14.133,-13.951 14.14,-13.286 14.199,-13.296 14.507,-13.358 14.514,-13.378 14.511,-14.5 14.483,-14.494 13.478,-14.291 13.032,-14.202 13.018,-14.195 13.022,-11.344 13.049,-11.35 13.368,-11.416 13.591,-11.46 13.595,-11.134 13.564,-11.124 13.519,-11.114 13.21,-11.052 13.183,-11.045 13.046,-11.018 13.018,-11.011 13.022,-10.541 13.042,-10.548 14.494,-10.839 14.514,-10.846 14.511,-11.309 14.446,-11.299 13.965,-11.203 13.941,-11.2 13.938,-11.525 13.969,-11.536 14.36,-11.611 14.387,-11.618 14.511,-11.646 14.514,-12.109 14.49,-12.112 14.47,-12.105 13.979,-12.006 13.43,-11.896 13.399,-11.893 13.396,-12.274 13.433,-12.284 13.752,-12.349 14.507,-12.5 14.514,-12.521 14.514,-12.61
  region: 13.553,-8.025 13.54,-8.012 13.533,-7.998 13.492,-7.909 13.485,-7.881 13.478,-7.833 13.475,-7.782 13.481,-7.72 13.488,-7.693 13.502,-7.658 13.536,-7.603 13.571,-7.569 13.584,-7.576 13.595,-7.586 13.601,-7.6 13.65,-7.648 13.656,-7.662 13.684,-7.689 13.643,-7.73 13.636,-7.744 13.615,-7.792 13.608,-7.861 13.615,-7.881 13.622,-7.909 13.636,-7.943 13.68,-8.008 13.735,-8.063 13.838,-8.111 13.886,-8.125 13.914,-8.132 13.962,-8.139 13.989,-8.146 14.514,-8.252 14.511,-8.4 14.446,-8.389 14.404,-8.382 13.512,-8.204 13.485,-8.197 13.488,-8.05 13.591,-8.07 13.595,-8.067 13.557,-8.029
  region: 13.509,-5.702 13.492,-5.658 13.485,-5.63 13.478,-5.582 13.475,-5.517 13.481,-5.462 13.488,-5.435 13.502,-5.4 13.536,-5.346 13.547,-5.335 13.553,-5.322 13.564,-5.311 13.577,-5.304 13.591,-5.291 13.667,-5.256 13.749,-5.243 13.866,-5.25 13.886,-5.256 14.068,-5.294 14.48,-5.376 14.507,-5.383 14.514,-5.404 14.511,-5.538 14.483,-5.531 14.027,-5.438 13.89,-5.411 13.797,-5.4 13.722,-5.407 13.674,-5.435 13.656,-5.445 13.65,-5.459 13.636,-5.473 13.622,-5.507 13.615,-5.534 13.608,-5.596 13.615,-5.617 13.625,-5.668 13.639,-5.702 13.674,-5.757 13.684,-5.768 13.691,-5.781 13.701,-5.792 13.715,-5.799 13.735,-5.819 13.825,-5.86 13.873,-5.874 13.9,-5.881 14.12,-5.922 14.147,-5.929 14.511,-6.004 14.514,-6.152 14.504,-6.155 14.483,-6.149 13.032,-5.857 13.018,-5.85 13.022,-5.702 13.341,-5.768 13.547,-5.809 13.577,-5.812 13.581,-5.809 13.547,-5.775 13.54,-5.761 13.512,-5.72 13.512,-5.706
  region: 13.557,-7.363 13.536,-7.356 13.492,-7.346 13.485,-7.325 13.488,-7.199 13.553,-7.209 13.897,-7.277 13.938,-7.284 14.487,-7.394 14.514,-7.401 14.511,-7.549 14.446,-7.538 13.588,-7.367 13.564,-7.363
  region: 13.176,-8.979 13.21,-8.986 13.207,-9.134 13.138,-9.127 13.118,-9.12 13.022,-9.1 13.018,-8.952 13.035,-8.949 13.056,-8.955 13.173,-8.976
  region: 14.435,-8.873 14.415,-8.866 14.411,-8.87 14.446,-8.904 14.452,-8.918 14.466,-8.931 14.5,-9.007 14.514,-9.055 14.521,-9.082 14.528,-9.172 14.518,-9.237 14.497,-9.292 14.463,-9.347 14.415,-9.395 14.401,-9.401 14.339,-9.429 14.284,-9.443 14.133,-9.436 14.113,-9.429 13.485,-9.302 13.488,-9.154 13.553,-9.165 14.137,-9.281 14.205,-9.288 14.216,-9.292 14.236,-9.285 14.291,-9.278 14.339,-9.244 14.363,-9.22 14.377,-9.185 14.391,-9.13 14.384,-9.041 14.37,-9.007 14.329,-8.931 14.271,-8.873 14.257,-8.866 14.168,-8.825 14.113,-8.811 13.485,-8.684 13.492,-8.533 13.495,-8.53 13.516,-8.537 14.319,-8.695 14.346,-8.701 14.511,-8.736 14.514,-8.883 14.504,-8.887 14.483,-8.88 14.442,-8.873
  region: 13.022,-8.55 13.21,-8.588 13.207,-8.736 13.138,-8.729 13.118,-8.722 13.022,-8.701 13.018,-8.554
  region: 13.2,-7.288 13.142,-7.277 13.039,-7.257 13.018,-7.25 13.022,-7.102 13.08,-7.113 13.149,-7.126 13.19,-7.133 13.21,-7.14 13.207,-7.288
Bottom Layer:
  pour cut-out: -17,-11.9 -18,-11.9 -18,-14.5 -17,-14.5
  pour cut-out: 17,-11.9 18,-11.9 18,-14.5 17,-14.5
  pour cut-out: 17,11.9 18,11.9 18,14.5 17,14.5
  pour cut-out: -17,11.9 -18,11.9 -18,14.5 -17,14.5

## Silkscreen, mask and mechanical layers (free items; w line width, h text height)
Top Overlay:
  text "WULPUS CH6" at 9.05,-3.865 h0.8 r90
  text "WULPUS Testbench / PolyCMUT Adapter v2.0 / Cedric Hirschi 10.01.25" at -11.8,-14.2 h1.2 r90
Top Solder:
  drawing of 10 lines, arcs and shapes, not listed
Board:
  the board outline again, w0.254
Assembly Notes:
  text "Stackup: JLC04161H-3313" at -16.632,20.762 h1.52